# EAGLE board Petra-Screw (EAGLE 7.7.0)
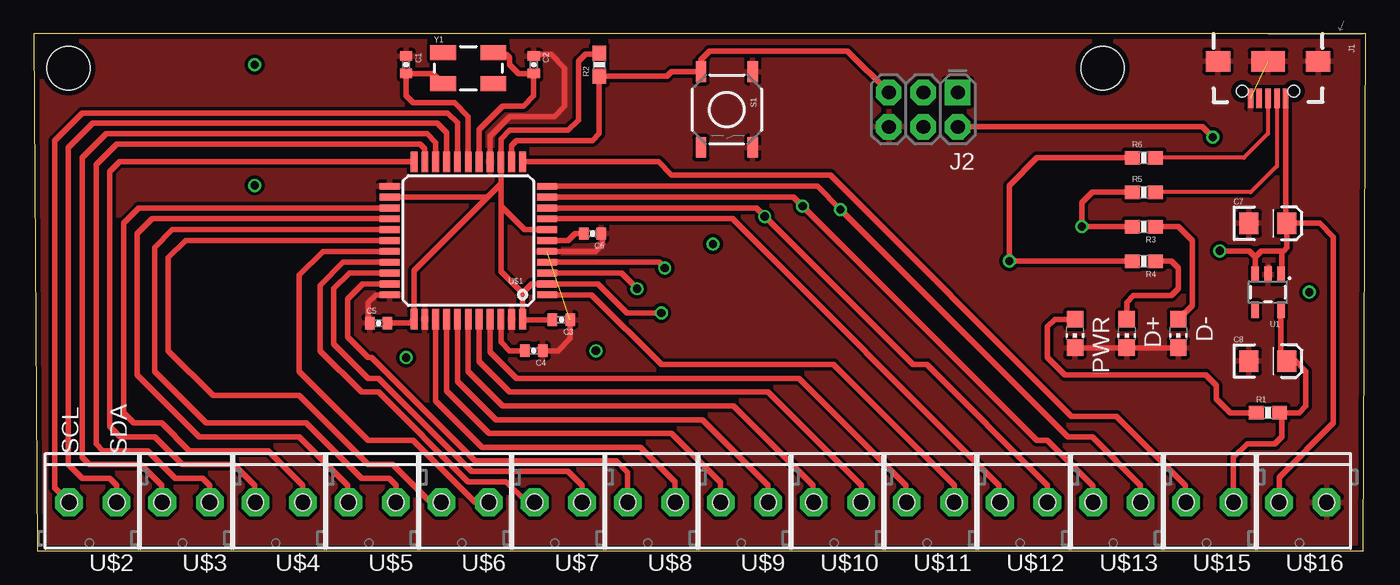
[diagram p0: board, top side]
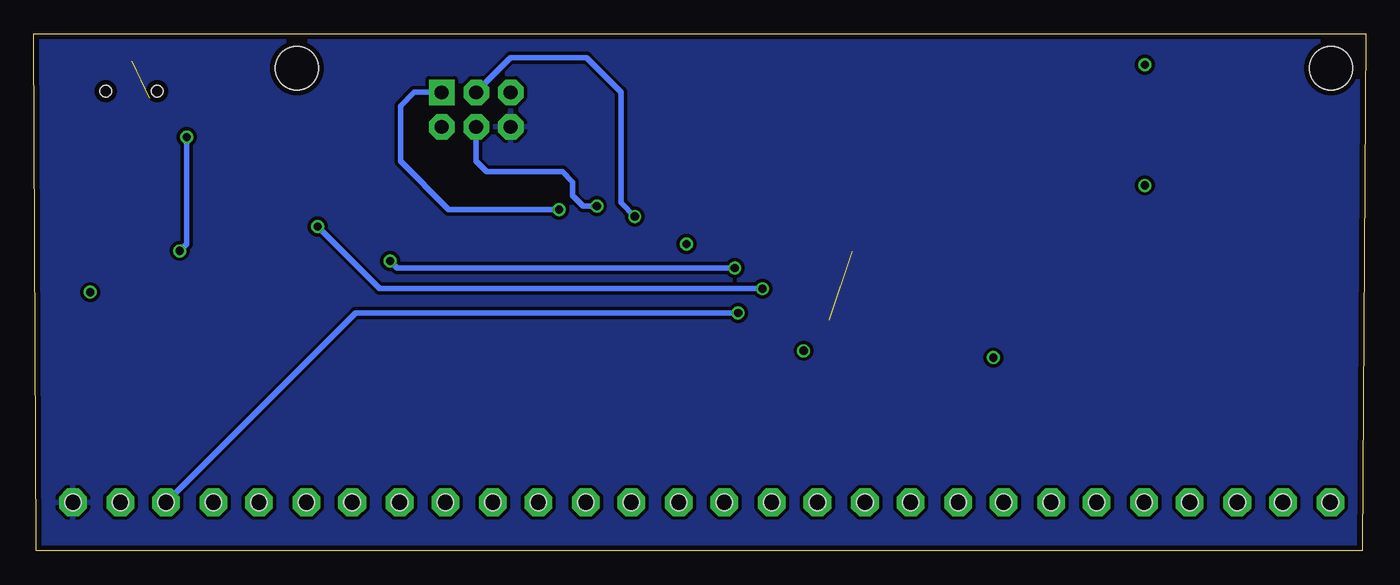
[diagram p1: board, bottom side, seen from below]

Size 98.12 x 38.09 mm. Coordinates in mm from the lower left corner, seen from the top.
Outline: 0.25,0 97.97,0 98.12,38.09 0,38.09 0.25,0
Copper layers (1*16): Top 0.0356mm / dielectric 1.5011mm / Bottom 0.0356mm
Design rules "oshpark-2layer": minimum track width 6mil, minimum drill 13mil, track to track 6mil, track to pad 6mil, pad to pad 6mil, via to via 6mil, smd to smd 6mil, copper to edge 15mil, drill to drill 6mil, minimum pad ring 7mil, minimum via ring 7mil, stop-mask expansion 2.5mil, vias tented up to drill 0mil, thermal gap 10mil
Net classes: 0 default: width 0.254 mm, drill 0.356 mm, clearance 0.254 mm
Holes 3.2 mm at 2.54,35.56 78.74,35.56

## Footprints (pad centres in the part's own frame; a part is rotated, then mirrored left to right if it is on the bottom)
0402-CAP = smd 0.7 x 0.9: 1 -0.65,0; 2 0.65,0
EIA3216 = smd 1.4 x 1.6: A 1.4,0; C -1.4,0
CHIP-LED0805 = smd 1.2 x 1.2: A 0,-1.05; C 0,1.05
USB-B-MICRO-SMD_V03 = smd 1.45 x 0.4: D+ 2.725,0; D- 2.725,0.65; GND 2.725,-1.3; ID 2.725,-0.65; VBUS 2.725,1.3 | smd 1.5 x 1.8: SHIELD1 0,3.685; SHIELD2 0,-3.685 | smd 1.5 x 2.5: SHIELD3 0,0 | hole 0.85: 2.2,1.9; 2.2,-1.9
2X3-NS = drill 1.016 pad 1.88 square: 1 -2.54,-1.27 | drill 1.016 pad 1.88 octagon: 2 -2.54,1.27; 3 0,-1.27; 4 0,1.27; 5 2.54,-1.27; 6 2.54,1.27
0603-RES = smd 1.1 x 1: 1 -0.85,0; 2 0.85,0
TACTILE-SWITCH-SMD = smd 1.524 x 0.762: 1 -2.794,1.905; 2 2.794,1.905; 3 -2.794,-1.905; 4 2.794,-1.905
SOT23-5 = smd 0.55 x 1.2: 1 -0.95,-1.3; 2 0,-1.3; 3 0.95,-1.3; 4 0.95,1.3; 5 -0.95,1.3
TQFP44 = smd 1.5 x 0.5: 1 -5.8,4; 2 -5.8,3.2; 3 -5.8,2.4; 4 -5.8,1.6; 5 -5.8,0.8; 6 -5.8,0; 7 -5.8,-0.8; 8 -5.8,-1.6; 9 -5.8,-2.4; 10 -5.8,-3.2; 11 -5.8,-4; 23 5.8,-4; 24 5.8,-3.2; 25 5.8,-2.4; 26 5.8,-1.6; 27 5.8,-0.8; 28 5.8,0; 29 5.8,0.8; 30 5.8,1.6; 31 5.8,2.4; 32 5.8,3.2; 33 5.8,4 | smd 0.5 x 1.5: 12 -4,-5.8; 13 -3.2,-5.8; 14 -2.4,-5.8; 15 -1.6,-5.8; 16 -0.8,-5.8; 17 0,-5.8; 18 0.8,-5.8; 19 1.6,-5.8; 20 2.4,-5.8; 21 3.2,-5.8; 22 4,-5.8; 34 4,5.8; 35 3.2,5.8; 36 2.4,5.8; 37 1.6,5.8; 38 0.8,5.8; 39 0,5.8; 40 -0.8,5.8; 41 -1.6,5.8; 42 -2.4,5.8; 43 -3.2,5.8; 44 -4,5.8
1X2-SCREW = drill 1.2 pad 2.032 octagon: 1 0,0; 2 3.5,0 | hole 1.2: 0,0; 3.5,0
CRYSTAL-SMD-5X3 = smd 1.9 x 1.1: 1 -1.85,-1.15; 2 1.85,-1.15; 3 1.85,1.15; 4 -1.85,1.15

## Placement (x,y rotation side)
C1  22pF  [0402-CAP]  27.43,35.81 270 top
C2  22pF  [0402-CAP]  36.83,35.81 270 top
C3  1uF  [0402-CAP]  38.86,17.02 180 top
C4  0.1uF  [0402-CAP]  36.83,14.73 180 top
C5  1uF  [0402-CAP]  25.4,16.76 0 top
C6  1uF  [0402-CAP]  41.15,23.37 180 top
C7  10uF  [EIA3216]  90.93,24.13 0 top
C8  10uF  [EIA3216]  90.93,13.97 0 top
D+  [CHIP-LED0805]  80.52,16 180 top
D-  [CHIP-LED0805]  84.33,16 180 top
J1  [USB-B-MICRO-SMD_V03]  90.93,36.07 270 top
J2  AVR_SPI_PRG_6NS  [2X3-NS]  65.53,32.51 180 top
PWR  [CHIP-LED0805]  76.71,16 180 top
R1  1K  [0603-RES]  90.93,10.16 0 top
R2  10K  [0603-RES]  41.66,35.81 90 top
R3  1K  [0603-RES]  81.79,23.88 180 top
R4  1K  [0603-RES]  81.79,21.34 180 top
R5  22  [0603-RES]  81.79,26.42 0 top
R6  22  [0603-RES]  81.79,28.96 0 top
S1  TAC_SWITCHSMD  [TACTILE-SWITCH-SMD]  51.05,32.51 270 top
U1  MIC5219 5V  [SOT23-5]  90.93,19.05 180 top
U$1  ATMEGA32U4TQFP-44  [TQFP44]  32,22.86 180 top
U$2  SCREW_1X2  [1X2-SCREW]  6.1,3.56 180 top
U$3  SCREW_1X2  [1X2-SCREW]  12.95,3.56 180 top
U$4  SCREW_1X2  [1X2-SCREW]  19.81,3.56 180 top
U$5  SCREW_1X2  [1X2-SCREW]  26.67,3.56 180 top
U$6  SCREW_1X2  [1X2-SCREW]  33.53,3.56 180 top
U$7  SCREW_1X2  [1X2-SCREW]  40.39,3.56 180 top
U$8  SCREW_1X2  [1X2-SCREW]  47.24,3.56 180 top
U$9  SCREW_1X2  [1X2-SCREW]  54.1,3.56 180 top
U$10  SCREW_1X2  [1X2-SCREW]  60.96,3.56 180 top
U$11  SCREW_1X2  [1X2-SCREW]  67.82,3.56 180 top
U$12  SCREW_1X2  [1X2-SCREW]  74.68,3.56 180 top
U$13  SCREW_1X2  [1X2-SCREW]  81.53,3.56 180 top
U$15  SCREW_1X2  [1X2-SCREW]  88.39,3.56 180 top
U$16  SCREW_1X2  [1X2-SCREW]  95.25,3.56 180 top
Y1  16MHz  [CRYSTAL-SMD-5X3]  32,35.56 0 top

## Library data of the parts
C1-C8 = SparkFun-Passives
D+ D- PWR = led
J1 = SparkFun-Connectors; PROD_ID: CONN-11752
J2 = SparkFun-Connectors
R1-R6 = SparkFun-Resistors; PROD_ID: RES-00824
S1 = SparkFun-Retired; PROD_ID: SWCH-08247
U1 = SparkFun-PowerIC; PROD_ID: VREG-10107
U$1 = SparkFun-DigitalIC
U$2-U$13 U$15 U$16 = PartsYouNeed
Y1 = SparkFun-FreqCtrl; PROD_ID: XTAL-08218

## Nets
D+: R4.2 R6.1 U$1.4
D-: R3.2 R5.1 U$1.3
GND: C1.1 C2.1 C3.1 C4.1 C5.1 C6.1 C7.C C8.C D+.C D-.C J1.GND J1.SHIELD1 J1.SHIELD2 J1.SHIELD3 J2.6 PWR.C S1.1 S1.2 U1.2 U$1.5 U$1.15 U$1.23 U$1.33 U$1.35 U$1.43 U$16.1
MISO: J2.1 U$1.11 U$13.1
MOSI: J2.4 U$1.10 U$13.2
N$1: C1.2 U$1.17 Y1.1
N$2: C2.2 U$1.16 Y1.3
N$3: C6.2 U$1.6
N$4: C4.2 U$1.42
N$5: J1.D- R5.2
N$6: J1.D+ R6.2
N$7: PWR.A R1.1
N$9: D+.A R4.1
N$11: D-.A R3.1
PB0: U$1.8 U$12.2
PB4: U$1.28 U$6.2
PB5: U$1.29 U$6.1
PB6: U$1.30 U$7.2
PB7: U$1.12 U$15.2
PC6: U$1.31 U$7.1
PC7: U$1.32 U$8.2
PD4: U$1.25 U$4.1
PD5: U$1.22 U$4.2
PD6: U$1.26 U$5.2
PD7: U$1.27 U$5.1
PE6: U$1.1 U$11.1
PF0: U$1.41 U$11.2
PF1: U$1.40 U$10.1
PF4: U$1.39 U$10.2
PF5: U$1.38 U$9.1
PF6: U$1.37 U$9.2
PF7: U$1.36 U$8.1
RST: J2.5 R2.1 S1.3 U$1.13
RX: U$1.20 U$3.2
SCK: J2.3 U$1.9 U$12.1
SCL: U$1.18 U$2.2
SDA: U$1.19 U$2.1
TX: U$1.21 U$3.1
VCC: C3.2 C5.2 C8.A R1.2 R2.2 U1.5 U$1.2 U$1.7 U$1.14 U$1.24 U$1.34 U$1.44 U$15.1
VIN: C7.A J1.VBUS J2.2 U1.1 U1.3 U$16.2

## Tracks (layer width: path | path; a pad name or v marks a point on that pad's centre or on a via)
D+  (via drill 0.6)
  Top 0.406: U$1.4 46.05,21.26 v46.48,20.83 | R6.1 73.91,28.96 71.88,26.92 v71.88,21.34 R4.2
  Bottom 0.406: v46.48,20.83 71.37,20.83 v71.88,21.34
D-  (via drill 0.6)
  Top 0.406: U$1.3 43.29,20.46 v44.45,19.3 | R5.1 77.98,26.42 77.22,25.65 v77.22,23.88 R3.2
  Bottom 0.406: v44.45,19.3 72.64,19.3 v77.22,23.88
GND  (2 unrouted)
  Top 0.254: 91.06,20.95 90.93,20.95
  Top 0.406: U$1.33 25.21,18.86 24.64,18.29 24.64,16.88 C5.1 | PWR.C D+.C D-.C | U$1.15 33.6,30.56 35.05,32 38.35,32 39.12,32.77 39.12,35.56 38.1,36.58 36.94,36.58 C2.1 | C3.1 39.51,15.64 38.61,14.73 C4.1 | U$1.5 41.36,22.06 41.91,22.61 41.91,23.26 C6.1
  pour Top: 0.25,37.85 97.54,37.85 97.54,0.51 0.25,0.51
  pour Bottom: 0.25,37.85 97.54,37.85 97.54,0.51 0.25,0.51
MISO  (via drill 0.6)
  Top 0.406: U$1.11 57.72,26.86 v59.44,25.15 76.2,8.38 77.98,8.38 81.53,4.83 U$13.1
  Bottom 0.406: v59.44,25.15 67.56,25.15 71.12,28.7 71.12,32.77 70.1,33.78 J2.1
MOSI  (via drill 0.6)
  Top 0.406: U$1.10 55.98,26.06 v56.64,25.4 73.91,8.13 74.68,8.13 78.03,4.77 U$13.2
  Bottom 0.406: v56.64,25.4 57.66,25.4 58.42,26.16 58.42,27.18 59.18,27.94 64.77,27.94 65.53,28.7 J2.4
N$1
  Top 0.406: Y1.1 29.4,35.16 C1.2 27.43,33.53 27.94,33.02 30.99,33.02 32,32 U$1.17
N$2
  Top 0.406: 34.1,36.46 Y1.3 33.99,36.58 34.8,36.58 35.05,36.32 35.05,35.81 35.7,35.16 C2.2 36.83,33.53 36.07,32.77 34.54,32.77 32.8,31.03 U$1.16
N$3
  Top 0.406: U$1.6 39.37,22.86 39.88,23.37 C6.2
N$4
  Top 0.406: U$1.42 34.4,15.38 35.05,14.73 C4.2
N$5
  Top 0.305: J1.D- 91.58,28.34 89.66,26.42 R5.2
N$6
  Top 0.305: J1.D+ 90.93,30.73 89.15,28.96 R6.2
N$7
  Top 0.406: R1.1 88.14,10.16 87.12,11.18 87.12,12.19 86.36,12.95 75.95,12.95 74.68,14.22 74.68,16.51 75.22,17.05 PWR.A
N$8  (via drill 0.6)
  other vias: 41.4,14.73
N$9
  Top 0.406: R4.1 83.82,21.34 84.33,20.83 84.33,19.3 83.82,18.8 81.03,18.8 80.52,18.29 D+.A
N$10  (via drill 0.6)
  other vias: 93.98,19.05
N$11
  Top 0.406: R3.1 84.33,23.88 85.34,22.86 85.34,18.07 D-.A
N$12  (via drill 0.6)
  other vias: 27.43,14.22
N$13  (via drill 0.6)
  other vias: 50.04,22.61
N$14  (via drill 0.6)
  other vias: 16.26,26.92
N$15  (via drill 0.6)
  other vias: 16.26,35.81
PB0
  Top 0.406: U$1.8 51.49,24.46 71.12,4.83 71.12,3.61 U$12.2
PB4
  Top 0.406: U$1.28 11.18,22.86 9.91,21.59 9.91,14.73 13.21,11.43 19.56,11.43 24.64,6.35 26.42,6.35 29.21,3.56 U$6.2
PB5
  Top 0.406: U$1.29 21.3,22.06 19.56,20.32 19.56,13.21 24.64,8.13 27.94,8.13 32.51,3.56 U$6.1
PB6
  Top 0.406: U$7.2 36.32,3.56 34.8,5.08 32,5.08 25.4,11.68 24.13,11.68 21.08,14.73 21.08,19.56 22.78,21.26 U$1.30
PB7
  Top 0.406: U$1.12 46.02,28.66 46.99,27.69 58.67,27.69 76.45,9.91 79.76,9.91 84.84,4.83 84.84,3.61 U$15.2
PC6
  Top 0.406: U$1.31 23.25,20.46 22.1,19.3 22.1,15.24 24.64,12.7 25.4,12.7 32.26,5.84 39.37,5.84 40.39,4.83 U$7.1
PC7
  Top 0.406: U$8.2 43.74,5.79 42.93,6.6 32.51,6.6 24.89,14.22 24.64,14.22 23.11,15.75 23.11,18.54 24.23,19.66 U$1.32
PD4
  Top 0.406: U$1.25 7.73,25.26 6.6,24.13 6.6,10.16 7.37,9.4 9.4,9.4 11.43,7.37 17.27,7.37 19.81,4.83 U$4.1
PD5
  Top 0.406: U$1.22 6.31,28.66 5.59,27.94 5.59,9.14 6.35,8.38 8.89,8.38 10.92,6.35 14.73,6.35 16.26,4.83 16.26,3.61 U$4.2
PD6
  Top 0.406: U$1.26 8.71,24.46 7.62,23.37 7.62,12.95 12.19,8.38 19.56,8.38 23.11,4.83 23.11,3.61 U$5.2
PD7
  Top 0.406: U$1.27 10.2,23.66 8.89,22.35 8.89,13.21 12.7,9.4 20.07,9.4 24.13,5.33 26.16,5.33 26.67,4.83 U$5.1
PE6
  Top 0.406: U$1.1 41.08,18.86 46.23,13.72 58.93,13.72 67.82,4.83 U$11.1
PF0
  Top 0.406: U$1.41 33.6,14.66 35.56,12.7 56.39,12.7 64.26,4.83 64.26,3.61 U$11.2
PF1
  Top 0.406: U$1.40 32.8,13.93 35.05,11.68 54.1,11.68 60.96,4.83 U$10.1
PF4
  Top 0.406: U$1.39 32,13.21 34.54,10.67 51.56,10.67 57.4,4.83 57.4,3.61 U$10.2
PF5
  Top 0.406: U$1.38 31.2,12.48 34.04,9.65 49.28,9.65 54.1,4.83 U$9.1
PF6
  Top 0.406: U$9.2 50.6,5.02 46.99,8.64 33.53,8.64 30.4,11.76 U$1.37
PF7
  Top 0.406: U$1.36 29.6,11.04 33.02,7.62 44.7,7.62 47.24,5.08 U$8.1
RST
  Top 0.406: U$1.13 35.2,29.87 35.56,30.23 41.15,30.23 41.66,30.73 R2.1 46.65,34.96 46.99,35.31 S1.3 49.15,36.2 49.78,36.83 59.94,36.83 J2.5
RX
  Top 0.406: U$1.20 29.6,30.09 28.96,30.73 5.33,30.73 3.56,28.96 3.56,6.86 4.06,6.35 7.87,6.35 9.4,4.83 9.4,3.61 U$3.2
SCK  (via drill 0.6)
  Top 0.406: U$1.9 53.23,25.26 v53.85,24.64 64.77,13.72 65.79,13.72 74.68,4.83 U$12.1
  Bottom 0.406: v53.85,24.64 54.86,25.65 54.86,33.78 57.4,36.32 62.99,36.32 J2.3
SCL
  Top 0.406: U$1.18 31.2,31.53 30.48,32.26 3.56,32.26 1.52,30.23 1.52,4.63 U$2.2
SDA
  Top 0.406: U$1.19 30.4,30.81 29.72,31.5 4.32,31.5 2.54,29.72 2.54,6.35 3.56,5.33 5.59,5.33 6.1,4.83 U$2.1
TX
  Top 0.406: U$1.21 28.8,29.62 28.45,29.97 6.1,29.97 4.57,28.45 4.57,7.87 5.08,7.37 8.38,7.37 10.41,5.33 12.45,5.33 12.95,4.83 U$3.1
VCC  (via drill 0.6)
  Top 0.406: C3.2 36.05,17.02 U$1.44 36,18.99 | C5.2 27.71,16.76 U$1.34 28,20.64 33.43,26.06 | R2.2 41.57,36.58 40.64,36.58 40.13,36.07 40.13,31.75 39.37,30.99 35.05,30.99 34.4,30.34 U$1.14 34.4,27.04 | U$15.1 88.39,6.86 89.41,7.87 91.44,7.87 91.95,8.38 91.95,9.99 R1.2 93.22,10.16 93.73,10.67 93.73,13.21 92.96,13.97 C8.A 91.88,14.42 U1.5 | v46.23,17.53 43.69,17.53 41.55,19.66 U$1.2 36.68,19.66 36,18.99 | 33.43,26.06 34.4,27.04 | 34.4,27.04 34.4,25.4 | 34.4,25.4 34.4,20.59 36,18.99 | U$1.7 36.14,23.66 34.4,25.4 | U$1.24 33.43,26.06
  Bottom 0.406: v46.23,17.53 74.42,17.53 U$15.1
VIN  (via drill 0.6)
  Top 0.406: J1.VBUS 92.23,24.23 C7.A | C7.A 92.33,22.35 92.08,22.1 91.95,22.1 | U1.1 91.95,20.42 91.95,22.1 | U1.3 89.98,21.66 | 89.98,21.66 90.42,22.1 91.95,22.1 | U$16.2 91.75,5.39 95.76,9.4 95.76,23.11 94.74,24.13 C7.A | J2.2 86.11,31.24 v86.87,30.48 | v87.38,22.1 89.54,22.1 89.98,21.66
  Bottom 0.406: v86.87,30.48 86.87,22.61 v87.38,22.1

## Text on the board
tPlace: SCL | SDA